# EAGLE board PCB_IC_v3 (EAGLE 9.6.2)

Size 160 x 100 mm. Coordinates in mm from the lower left corner, seen from the top.
Outline: 0,0 160,0 160,100 0,98.73 0,0
Copper layers (1*16): Top 0.035mm / dielectric 1.5mm / Bottom 0.035mm
Design rules "default *": minimum track width 1mm, minimum drill 0.35mm, track to track 0.8mm, track to pad 6mil, pad to pad 6mil, via to via 6mil, smd to smd 6mil, copper to edge 40mil, drill to drill 6mil, minimum pad ring 10mil, minimum via ring 8mil, stop-mask expansion 4mil, vias tented up to drill 0mil, thermal gap 10mil
Holes 4 mm at 9.7,71.83 9.7,87.83 79.1,71.83 79.1,87.83

## Footprints (pad centres in the part's own frame; a part is rotated, then mirrored left to right if it is on the bottom)
TT5D11 = drill 0.813: + -2.54,0 | drill 0.813 octagon: - 2.54,0
C025-030X050 = drill 0.813 octagon: 1 -1.27,0; 2 1.27,0
3,81/1,1 = drill 1.118 pad 3.81 octagon: 1 0,0
3,81/1,4 = drill 1.397 pad 3.81 octagon: 1 0,0
MCS08 = drill 1.194 pad 2.159 octagon: MP 0,0
TO220V = drill 1.016 long: 1 -2.54,-2.54; 2 0,-2.54; 3 2.54,-2.54
LED3MM = drill 0.813 octagon: A -1.27,0; K 1.27,0
INFINEON_IRFB7730PBF_0 = drill 1.3 pad 2 square: 1 -0.61,2.54 | drill 1.3 pad 2: 2 -0.61,0; 3 -0.61,-2.54
0207/10 = drill 0.813 octagon: 1 -5.08,0; 2 5.08,0
0204/7 = drill 0.813 octagon: 1 -3.81,0; 2 3.81,0
SOIC127P1030X265-24N = smd 1.6 x 0.533: 1 -4.826,6.985; 2 -4.826,5.715; 3 -4.826,4.445; 4 -4.826,3.175; 5 -4.826,1.905; 6 -4.826,0.635; 7 -4.826,-0.635; 8 -4.826,-1.905; 9 -4.826,-3.175; 10 -4.826,-4.445; 11 -4.826,-5.715; 12 -4.826,-6.985; 13 4.826,-6.985; 14 4.826,-5.715; 15 4.826,-4.445; 16 4.826,-3.175; 17 4.826,-1.905; 18 4.826,-0.635; 19 4.826,0.635; 20 4.826,1.905; 21 4.826,3.175; 22 4.826,4.445; 23 4.826,5.715; 24 4.826,6.985
AK500/2-H = drill 1.321 long: 1 -2.515,0; 2 2.515,0

## Placement (x,y rotation side)
C1  [TT5D11]  13.97,55.88 0 top
C2  [C025-030X050]  57.15,46.99 0 top
C3  [C025-030X050]  29.21,55.88 0 top
C4  [C025-030X050]  31.75,52.07 180 top
C5  [C025-030X050]  77.47,31.75 180 top
C7  [TT5D11]  13.97,44.45 0 top
C8  [TT5D11]  13.97,33.02 0 top
C12  [C025-030X050]  52.07,35.56 0 top
C13  [C025-030X050]  52.07,30.48 0 top
C14  [C025-030X050]  52.07,40.64 0 top
ENABLE  [3,81/1,1]  78.74,93.98 0 top
FWD/REV  [3,81/1,4]  59.69,93.98 0 top
GND_HALLS  [3,81/1,1]  7.62,93.98 0 top
GND_THROTTLE  [3,81/1,1]  35.56,93.98 0 top
HALL_5V_PAD  MCS08  [MCS08]  26.67,93.98 0 top
HALL_A_PAD  MCS08  [MCS08]  11.43,93.98 0 top
HALL_B_PAD  MCS08  [MCS08]  16.51,93.98 0 top
HALL_C_PAD  MCS08  [MCS08]  21.59,93.98 0 top
IC1  7805TV  [TO220V]  30.48,66.04 0 top
LED1  TLLY4400  [LED3MM]  68.58,66.04 180 top
PHASEA  [3,81/1,4]  19.05,2.54 0 top
PHASEB  [3,81/1,4]  49.53,2.54 0 top
PHASEC  [3,81/1,4]  82.55,2.54 0 top
Q1  INFINEON_IRFB7730PBFINFINEON_IRFB7730PBF_0_0  [INFINEON_IRFB7730PBF_0]  11.43,8.89 270 top
Q2  INFINEON_IRFB7730PBFINFINEON_IRFB7730PBF_0_0  [INFINEON_IRFB7730PBF_0]  26.67,8.89 270 top
Q3  INFINEON_IRFB7730PBFINFINEON_IRFB7730PBF_0_0  [INFINEON_IRFB7730PBF_0]  41.91,8.89 270 top
Q4  INFINEON_IRFB7730PBFINFINEON_IRFB7730PBF_0_0  [INFINEON_IRFB7730PBF_0]  58.67,8.89 270 top
Q5  INFINEON_IRFB7730PBFINFINEON_IRFB7730PBF_0_0  [INFINEON_IRFB7730PBF_0]  74.93,8.89 270 top
Q6  INFINEON_IRFB7730PBFINFINEON_IRFB7730PBF_0_0  [INFINEON_IRFB7730PBF_0]  90.17,8.89 270 top
R1  4.7k  [0207/10]  13.97,19.05 90 top
R2  4.7k  [0207/10]  29.21,19.05 90 top
R3  4.7k  [0207/10]  44.45,19.05 90 top
R4  4.7k  [0207/10]  61.21,19.05 90 top
R5  4.7k  [0207/10]  77.47,19.05 90 top
R6  4.7k  [0207/10]  92.71,19.05 90 top
R7  4.7k  [0207/10]  41.91,50.8 0 top
R8  [0207/10]  69.85,55.88 90 top
R9  [0207/10]  86.36,39.37 90 top
R10  [0207/10]  71.12,41.91 90 top
R11  [0204/7]  43.18,35.56 180 top
R12  [0204/7]  43.18,30.48 180 top
R13  [0204/7]  43.18,40.64 180 top
R14  [0204/7]  30.48,35.56 0 top
R15  [0204/7]  30.48,30.48 0 top
R16  [0204/7]  30.48,40.64 0 top
SW_ENABLE_GND  [3,81/1,4]  73.66,93.98 0 top
SW_FWDREV_GND  [3,81/1,4]  64.77,93.98 0 top
THROT_5V  [3,81/1,4]  48.26,93.98 0 top
THROT_IN  [3,81/1,4]  41.91,93.98 0 top
U3  MC33035DWG  [SOIC127P1030X265-24N]  57.15,59.69 0 top
VCC+  [3,81/1,4]  11.43,66.04 0 top
VCC-  [3,81/1,4]  16.51,66.04 0 top
X1  [AK500/2-H]  85.09,80.01 270 top
X2  [AK500/2-H]  3.81,80.01 90 top

## Library data of the parts
C1-C5 C7 C8 C12-C14 = rcl; SPICEPREFIX: C
ENABLE FWD/REV GND_HALLS GND_THROTTLE PHASEA PHASEB PHASEC SW_ENABLE_GND SW_FWDREV_GND THROT_5V THROT_IN VCC+ VCC- = wirepad
HALL_5V_PAD HALL_A_PAD HALL_B_PAD HALL_C_PAD = solpad
IC1 = linear
LED1 = led; MF: VISHAY SEMICONDUCTOR; OC_FARNELL: 1612439
Q1-Q6 = Infineon - IRFB7730PBF; AUTOMOTIVE: No; CENTROID_NOT_SPECIFIED: No; CONTINUOUS_DRAIN_CURRENT: 195A; DATASHEET: https://www.infineon.com/dgdl/irfs7730pbf.pdf?fileId=5546d462533600a40153563aad5921dc; DEPLETION_MODE: False; DEVICE_CLASS_L1: Discrete Semiconductors; DEVICE_CLASS_L2: Transistors; DEVICE_CLASS_L3: MOSFETs; DIGIKEY_DESCRIPTION: MOSFET N-CH 75V 195A TO220; DIGIKEY_PART_NUMBER: IRFB7730PBF-ND; DRAIN_TO_SOURCE_BREAKDOWN_VOLTAGE: 75V; DRAIN_TO_SOURCE_RESISTANCE: 2.2mΩ; DRAIN_TO_SOURCE_VOLTAGE: 75V; FOOTPRINT_PARAMETERS_0: {"fp_type":"TO220","params":{"N":{"long name":"Number of leads","type":"fixed","short name":"N","value":3},"A":{"nom":false,"long name":"Total height","min":15800000,"max":16129999,"short name":"A","type":"measurement"},"A1":{"nom":false,"long name":"Package clearance","min":3370000,"max":3670000,"short name":"A1","type":"measurement"},"D":{"nom":false,"long name":"Package length","min":false,"max":10750000,"short name":"D","type":"measurement"},"E":{"nom":false,"long name":"Package width","min":false,"max":4830000,"short name":"E","type":"measurement"},"B":{"nom":false,"long name":"Lead width","min":610000,"max":940000,"short name":"B","type":"measurement"},"C":{"nom":false,"long name":"Lead thickness","min":330000,"max":630000,"short name":"C","type":"measurement"},"e":{"nom":2540000,"long name":"Lead pitch","min":null,"max":null,"short name":"e","type":"measurement"},"offset x":{"nom":0,"long name":"X Center offset","min":null,"max":null,"short name":"offset x","type":"measurement"},"offset y":{"nom":0,"long name":"Y Center offset","min":null,"max":null,"short name":"offset y","type":"measurement"},"LS":{"default":"Circle","long name":"Land shape","type":"multichoice","short name":"LS"},"LS1":{"default":"Square","long name":"Land shape (Pin 1)","type":"multichoice","short name":"LS1"}}}; FOOTPRINT_URL: https://www.infineon.com/dgdl/po-to220ab-fp.pdf?fileId=5546d462580663ef0158068cfbee01be; FOOTPRINT_VARIANT_NAME_0: Recommended_Land_Pattern; GATE_CHARGE_AT_VGS: 271nC @ 10V; GATE_TO_SOURCE_VOLTAGE: 20V; HEIGHT: 19.8mm; INPUT_CAPACITACE_AT_VDS: 13660pF @ 25V; IPC_LAND_PATTERN_NAME: TO-220; LEAD_FREE: Yes; MAX_FORWARD_DIODE_VOLTAGE: 1.2V; MAX_JUNCTION_TEMP: +175°C; MF: Infineon; MFG_PACKAGE_IDENT: PG-TO220-3; MFG_PACKAGE_IDENT_COMPONENT_ID: 802d71249bb95e7c; MFG_PACKAGE_IDENT_DATE: 02/2008; MFG_PACKAGE_IDENT_REV: 904; MOUSER_PART_NUMBER: 942-IRFB7730PBF; MPN: IRFB7730PBF; NUMBER_OF_CHANNELS: 1; NUMBER_OF_N_CHANNELS: 1; PACKAGE: TO-220AB; POWER_DISSIPATION: 375W; PREFIX: Q; PULSE_DRAIN_CURRENT: 984A; REVERSE_RECOVERY_CHARGE: 70nC; REVERSE_RECOVERY_TIME: 44ns; ROHS: Yes; RTHJA_MAX: 62°C/W; STANDOFF_HEIGHT: 3.37mm; TECHNOLOGY: MOSFET; TEMPERATURE_RANGE_HIGH: +175°C; TEMPERATURE_RANGE_LOW: -55°C; THRESHOLD_VGS: 2.1V; THRESHOLD_VGS_MAX: 3.7V; THRESHOLD_VGS_MIN: 2.1V; TURN_OFF_DELAY_TIME: 180ns; TURN_ON_DELAY_TIME: 21ns; VERIFICATION_VERSION: 0.0.0.3
R1-R16 = rcl; SPICEPREFIX: R
U3 = MC33035DWG; AVAILABILITY: In Stock; DESCRIPTION: - Motor Driver - Analog 24-SOIC; MF: ON Semiconductor; MP: MC33035DWG; PACKAGE: SOIC-24 ON Semiconductor; PRICE: None; PURCHASE-URL: https://pricing.snapeda.com/search/part/MC33035DWG/?ref=eda
X1 X2 = con-ptr500; OC_FARNELL: unknown; OC_NEWARK: unknown

## Nets
5V: C4.1 HALL_5V_PAD.MP IC1.3 R7.1 R14.2 R15.2 R16.2 THROT_5V.1 U3.8
15V: U3.17 U3.18 X2.1
CURRENT_SENSE: U3.9
GND: C2.2 C12.2 C13.2 C14.2 LED1.K SW_ENABLE_GND.1 SW_FWDREV_GND.1 U3.15 U3.16 U3.22 U3.23 X1.1 X2.2
I_SENSE_NOFILTER: C1.- C7.- C8.- Q2.3 Q4.3 Q6.3 VCC-.1
N$1: C1.+ C7.+ C8.+ Q1.2 Q3.2 Q5.2 VCC+.1
N$2: Q1.1 R1.1
N$3: FWD/REV.1 U3.3
N$4: ENABLE.1 U3.7
N$5: R3.2
N$6: Q2.1 R2.1
N$7: Q3.1 R3.1
N$8: Q4.1 R4.1
N$9: Q5.1 R5.1
N$10: Q6.1 R6.1
N$11: U3.12 U3.13
N$12: C3.2 C4.2 GND_HALLS.1 GND_THROTTLE.1 IC1.2
N$13: R9.2 R10.2
N$19: C3.1 IC1.1
N$20: R8.1 U3.14
N$21: THROT_IN.1 U3.11
N$24: C2.1 R7.2 U3.10
N$25: LED1.A R8.2
N$27: C5.1 R9.1
N$29: HALL_A_PAD.MP R13.1 R16.1
N$31: C5.2 R10.1
N$32: HALL_B_PAD.MP R12.1 R15.1
N$33: HALL_C_PAD.MP R11.1 R14.1
OUT_A_HIGH: R1.2 U3.2
OUT_A_LOW: R2.2 U3.21
OUT_B_HIGH: U3.1
OUT_B_LOW: R4.2 U3.20
OUT_C_HIGH: U3.24
OUT_C_LOW: R6.2 U3.19
PAD_HALL_A: C14.1 R13.2 U3.4
PAD_HALL_B: C13.1 R12.2 U3.5
PAD_HALL_C: C12.1 R11.2 U3.6
PHASE_B: PHASEB.1 Q3.3 Q4.2
PHASE_C: PHASEC.1 Q5.3 Q6.2
VCC+: X1.2

## Tracks (layer width: path | path; a pad name or v marks a point on that pad's centre or on a via)
5V  (8 unrouted)
15V  (2 unrouted)
GND  (12 unrouted)
I_SENSE_NOFILTER  (6 unrouted)
N$1  (6 unrouted)
N$2  (1 unrouted)
N$3  (1 unrouted)
N$4  (1 unrouted)
N$6  (1 unrouted)
N$7  (1 unrouted)
N$8  (1 unrouted)
N$9  (1 unrouted)
N$10  (1 unrouted)
N$11  (1 unrouted)
N$12  (4 unrouted)
N$13  (1 unrouted)
N$19  (1 unrouted)
N$20  (1 unrouted)
N$21  (1 unrouted)
N$24  (2 unrouted)
N$25  (1 unrouted)
N$27  (1 unrouted)
N$29  (2 unrouted)
N$31  (1 unrouted)
N$32  (2 unrouted)
N$33  (2 unrouted)
OUT_A_HIGH  (1 unrouted)
OUT_A_LOW  (1 unrouted)
OUT_B_LOW  (1 unrouted)
OUT_C_LOW  (1 unrouted)
PAD_HALL_A  (2 unrouted)
PAD_HALL_B  (2 unrouted)
PAD_HALL_C  (2 unrouted)
PHASE_B  (2 unrouted)
PHASE_C  (2 unrouted)
(copper drawn outside any net)
  shapes: Top area x2